# Altium PCB MotorDriverPCB.PcbDoc
Units mil, origin at the board's own origin, x right, y up, seen from the top; angles counter-clockwise.
Board outline 6000 x 4000 mil, 2 copper layers (Top Layer, Bottom Layer); 70 components, 46 nets, 245 pads, 1 vias.
Unrouted connection lines stored in the file: 128.
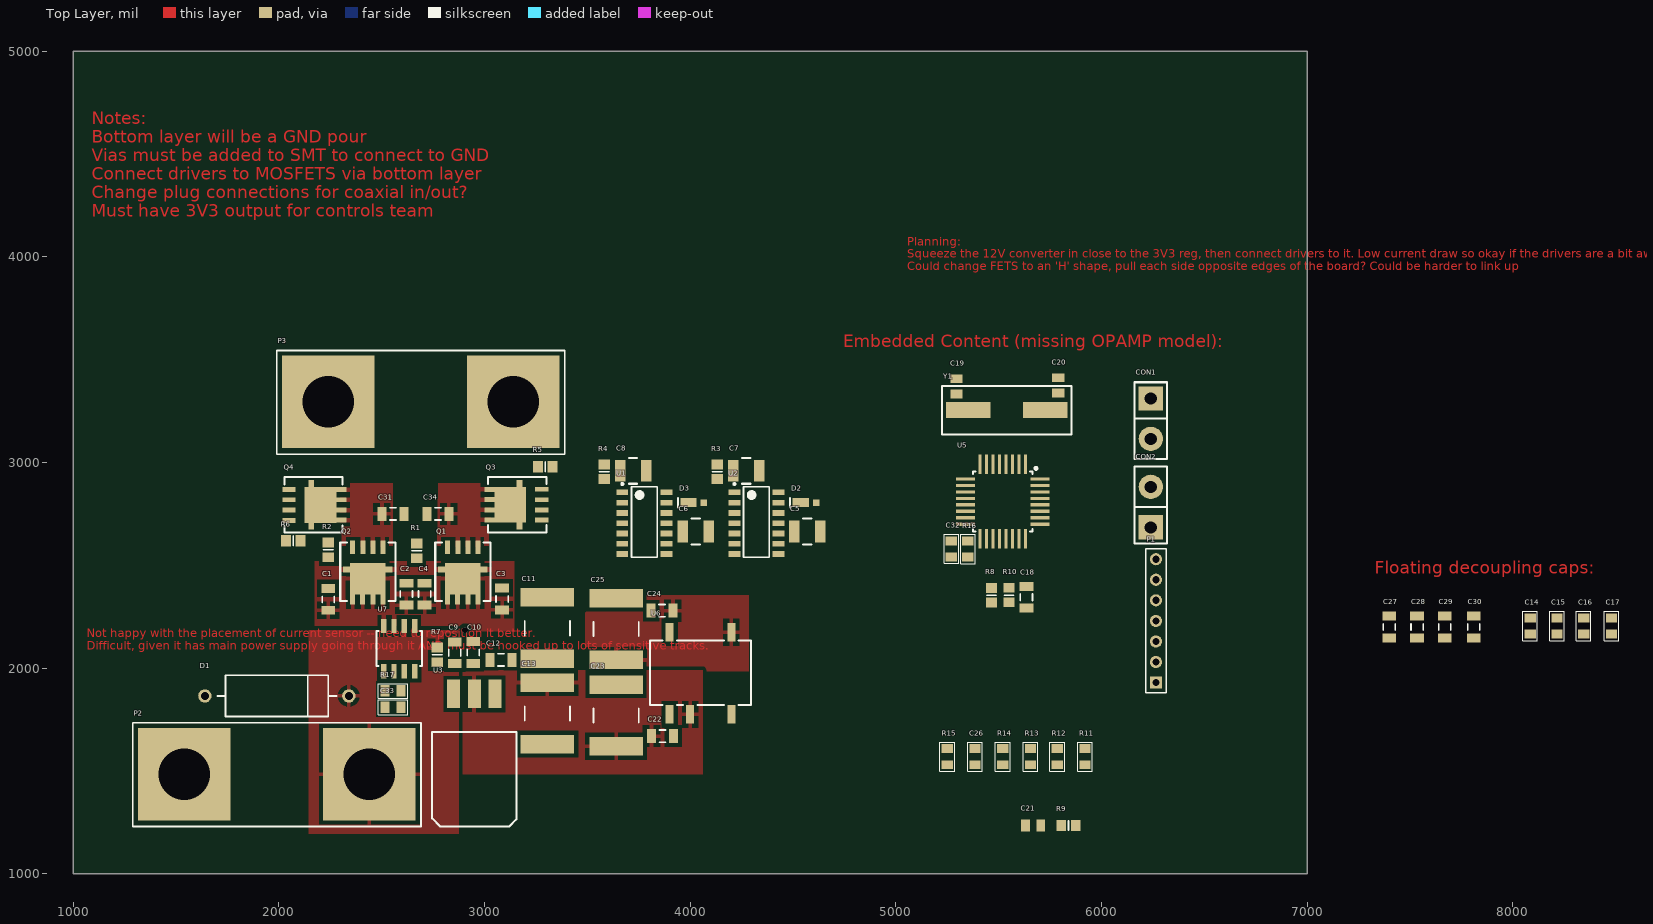
[diagram p0: Top Layer view]
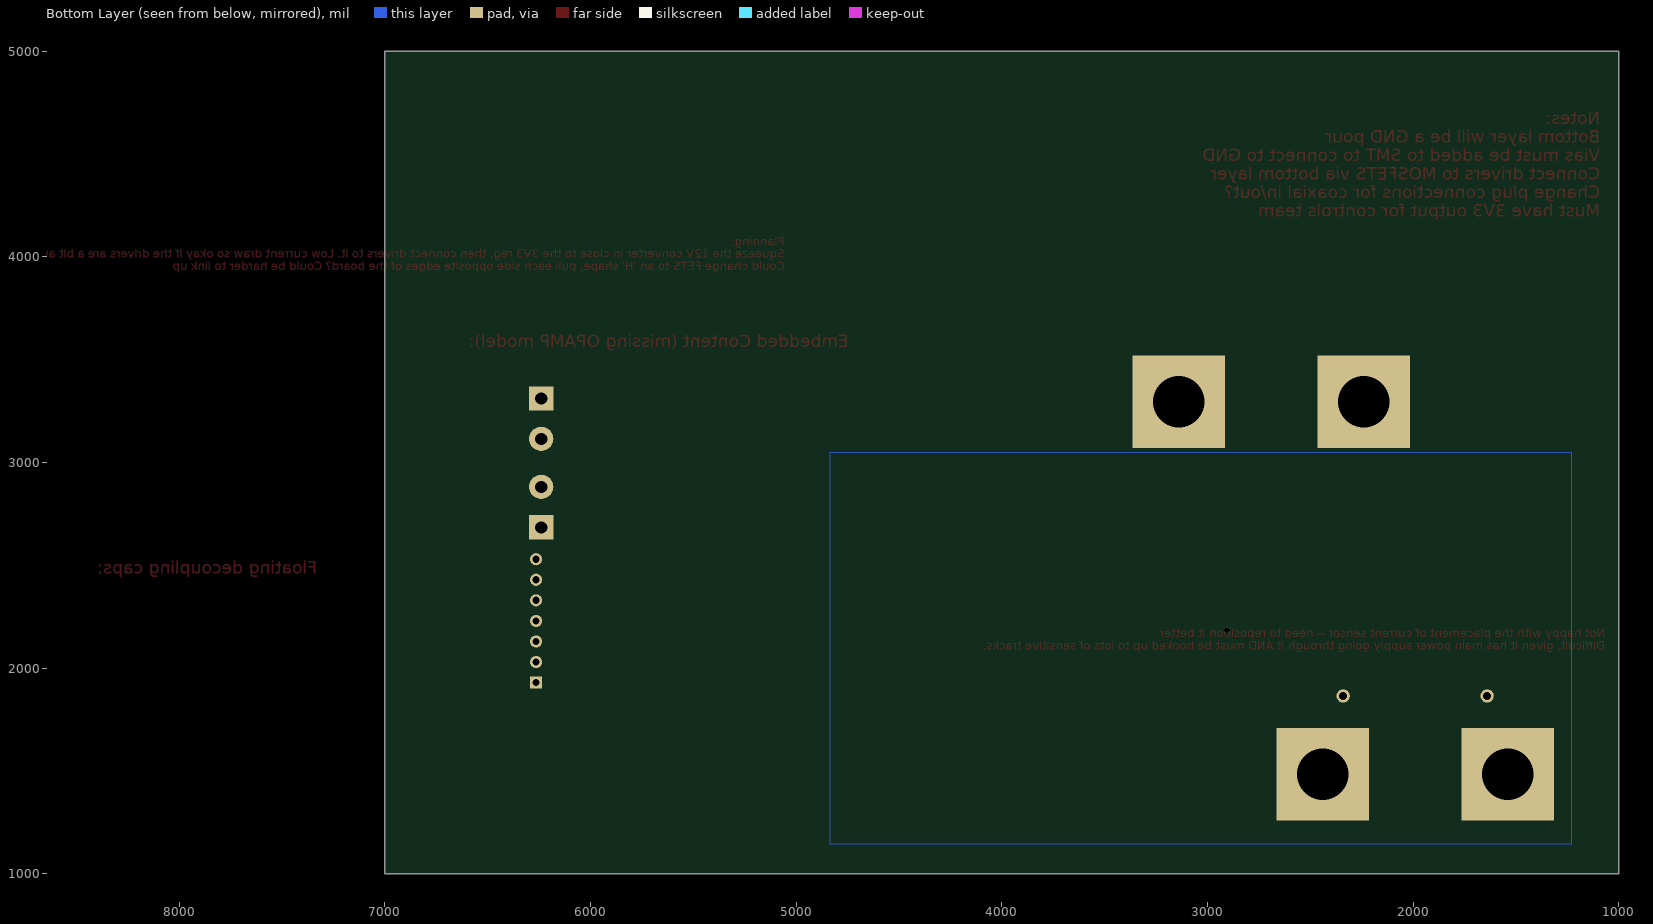
[diagram p1: Bottom Layer view, seen from below]

## Layer stack, top to bottom
Top Solder: solder mask 0.4, Solder Resist, Dk 3.5
Top Layer: signal copper 1.4
Dielectric 1: dielectric 12.6, FR-4, Dk 4.8
Bottom Layer: signal copper 1.4
Bottom Solder: solder mask 0.4, Solder Resist, Dk 3.5

## Board outline
1000,1000 7000,1000 7000,5000 1000,5000

## Design rules (kind name [scope] priority, off if disabled: settings)
BoardOutlineClearance [All] p1: gap=10 ignorepadtopadclearanceinfootprint=FALSE except(0: Arc-SplitContinuation Track-SplitContinuation SMDPad-SplitContinuation THPad-SplitContinuation Via-SplitContinuation Fill-SplitContinuation Poly-SplitContinuation Region-SplitContinuation Text-SplitContinuation)
Clearance [All] p1: gap=19.68 ignorepadtopadclearanceinfootprint=FALSE
Height [All] p1: minheight=0 maxheight=3937.01 prefheight=500
HoleSize [All] p1: absolutevalues=TRUE maxlimit=393.7 minlimit=19.68 maxpercent=80.000 minpercent=20.000
PolygonConnect [All] p1: connectstyle=Relief reliefconductorwidth=19.68 reliefentries=4 polygonreliefangle="90 Angle" airgapwidth=19.68
RoomDefinition ConverterSch [InComponentClass('ConverterSch')] p1: confinementstyle=ConfineIn formatcopy=TRUE lockcomponents=FALSE outline 845,900 8960,900 8960,9485 845,9485
RoutingVias [All] p1: holewidth=28 width=50 viastyle="Through Hole" minholewidth=28 minwidth=50 maxholewidth=28 maxwidth=50
SilkToSilkClearance [All] p1: silktosilkclearance=3.94
SilkToSolderMaskClearance [IsPad] p1: minsilkscreentomaskgap=3.94 clearancetoexposedcopper=TRUE
SolderMaskExpansion [All] p1: expansion=4 istentingtop=FALSE
Width [All] p1: maxlimit=393.7 minlimit=19.68 preferedwidth=39.37
26 further rules are at their usual default settings.

## Components (designator, comment, footprint, x,y, rotation, side; value= is the part's Value field where it differs from the comment)
C1 "Cap CER" C1206 2240,2335 r270 top value=100nF/100V
C2 "Cap CER" C1206 2620,2360 r270 top value=100nF/100V
C3 "Cap CER" C1206 3085,2336.85 r270 top value=100nF/100V
C4 "Cap CER" C1206 2708.31,2359.84 r270 top value=100nF/100V
C5 "Cap CER" C1210 4569.29,2665 r0 top value=2200nF/100V
C6 "Cap CER" C1210 4027.28,2665 r0 top value=2200nF/100V
C7 "Cap CER" C1210 4272.28,2960 r180 top value=2200nF/100V
C8 "Cap CER" C1210 3722.28,2960 r180 top value=2200nF/100V
C9 "CER 6.8nF" C1206 2855,2075 r270 top value=100nF/100V
C10 "CER 100nF" C1206 2945,2076.85 r270 top value=100nF/100V
C11 "Film 10uF" LDECE4150KA0N00 3305,2194.61 r270 top value=1.5uF/50V
C12 "CER 100nF" C1206 3080,2040 r180 top value=100nF/100V
C13 "Film 10uF" LDECE4150KA0N00 3305,1780.39 r90 top value=1.5uF/50V
C14 "" "0805 CAP" 8085,2205 r90 top
C15 "" "0805 CAP" 8215,2205 r90 top
C16 "" "0805 CAP" 8345,2205 r90 top
C17 "" "0805 CAP" 8480,2205 r90 top
C18 "CER 100nF" C1206 5635,2345 r90 top value=100nF/100V
C19 "Capacitor 0805" C0805 5295,3370 r90 top
C20 "Capacitor 0805" C0805 5790,3375 r90 top
C21 "Capacitor 0805" C0805 5667.4,1235 r0 top
C22 "CER 100nF" C1206 3865,1670 r180 top value=100nF/100V
C23 "Film 10uF" LDECE4150KA0N00 3640,1769.61 r270 top value=1.5uF/50V
C24 "CER 100nF" C1206 3863.15,2280 r0 top value=100nF/100V
C25 "Film 2.2uF" LDECE4150KA0N00 3640,2190 r270 top value=1.5uF/50V
C26 "" "0805 CAP" 5385,1570 r90 top
C27 "CER 100nF" C1206 7400,2200 r90 top value=100nF/100V
C28 "CER 100nF" C1206 7535,2200 r90 top value=100nF/100V
C29 "CER 100nF" C1206 7670,2200 r90 top value=100nF/100V
C30 "CER 100nF" C1206 7810,2200 r90 top value=100nF/100V
C31 "CER 100nF" C1206 2554.35,2750 r180 top value=100nF/100V
C32 "" "0805 CAP" 5270,2580 r270 top
C33 "" "0805 CAP" 2555,1810 r0 top
C34 "CER 100nF" C1206 2773.15,2750 r0 top value=100nF/100V
CON1 "Header 2X1" HDR2X1_5 6240,3211.85 r270 top
CON2 "Header 2X1" HDR2X1_5 6240,2785 r90 top
D1 "D Zener" DIODE-0.7 1990,1865 r0 top
D2 "MSS1P6-M3/89A" "MicroSMP (DO-219AD)" 4574.68,2805 r0 top
D3 "MSS1P6-M3/89A" "MicroSMP (DO-219AD)" 4029.68,2805 r0 top
P1 "BLE Headers" HDR1X7 6265,1930 r90 top
P2 "Dual Banana Plugs" "Dual Banana Plug" 1990,1485 r0 top
P3 "Dual Banana Plugs" "Dual Banana Plug" 2690,3295 r0 top
Q1 "NMOS" BSC072N08NS5ATMA1_modified_v2 2894,2465 r180 top
Q2 "NMOS" BSC072N08NS5ATMA1_modified_v2 2432,2465 r180 top
Q3 "NMOS" BSC072N08NS5ATMA1_modified_v2 3155.26,2795.14 r90 top
Q4 "NMOS" BSC072N08NS5ATMA1_modified_v2 2172,2794 r270 top
R1 "Resistor 0805" R0805 2670,2570.43 r90 top value=?
R2 "Resistor 0805" R0805 2240,2575.43 r90 top value=?
R3 "Resistor 0805" R0805 4132.28,2955 r90 top value=?
R4 "Resistor 0805" R0805 3582.28,2955 r90 top value=?
R5 "Resistor 0805" R0805 3295,2980 r0 top value=?
R6 "Resistor 0805" R0805 2069.57,2620 r180 top value=?
R7 "22k" R0805 2770,2065 r270 top value=?
R8 "Resistor 0805" R0805 5465,2355 r270 top value=?
R9 "Resistor 0805" R0805 5840,1235 r0 top
R10 "Resistor 0805" R0805 5550,2355.43 r90 top value=?
R11 "" "0805 RES" 5920,1570 r90 top
R12 "" "0805 RES" 5785,1570 r90 top
R13 "" "0805 RES" 5655,1570 r90 top
R14 "" "0805 RES" 5520,1570 r90 top
R15 "" "0805 RES" 5250,1570 r90 top
R16 "" "0805 RES" 5350,2579.37 r90 top
R17 "" "0805 RES" 2555,1890 r180 top
U1 "IRS21834SPBF" SOIC127P600X175-14N 3777.28,2705 r0 top
U2 "IRS21834SPBF" SOIC127P600X175-14N 4322.28,2705 r0 top
U3 "LD1086D2M33TR" D2PAK-3L 2950,1525 r180 top
U5 "ATMega328PB" TQFP32 5520,2810 r270 top
U6 "ISE0312A" ISE0312A 4050,1965 r90 top
U7 "ACS70331" ACS70331 2585,2095 r270 top
Y1 "SMT-XTAL 16MHz" HC49-US 5540,3255 r0 top

## Footprints (in the part's own frame and the unit in brackets; to place one, negate y for a bottom-side part, rotate by r counter-clockwise, add the part's x,y. Pads: shape width x height; smd on the part's side, far side on the other; paste and mask are expansions set on the pad)
"0805 CAP" [mm] "http://www.digikey.co.nz/Web%20Export/Supplier%20Content/Vishay_8026/PDF/VishayBeyschlag_SolderPad.pdf?redirected=1 with dimension G modified by +0.25mm"
  rect 1.1x1.4 smd: 1(-1,0) 2(1,0)
  silkscreen extent -1.8,-0.9 1.8,0.9, body extent -1.04,-0.66 1.04,0.66, height 0.61
"0805 RES" [mm] "http://www.digikey.co.nz/Web%20Export/Supplier%20Content/Vishay_8026/PDF/VishayBeyschlag_SolderPad.pdf?redirected=1 with dimension G modified by +0.25mm"
  rect 1.1x1.4 smd: 1(-1,0) 2(1,0)
  silkscreen extent -1.8,-0.9 1.8,0.9, body extent -1.04,-0.66 1.04,0.66, height 0.61
ACS70331 [mil] "8-SOIC model; 8 leads"
  rect 68.9x25.6 smd: 1(-110.24,75) 2(-110.24,25) 3(-110.24,-25) 4(-110.24,-75) 5(110.24,-75) 6(110.24,-25) 7(110.24,25) 8(110.24,75)
  silkscreen extent -85,-110 85,110, body extent -118,-97 118,96, height 62
BSC072N08NS5ATMA1_modified_v2 [mil]
  rect 23.94x65 smd: 1(-74,-123) 1(-25,-123) 1(24,-123) 4(75,-123) 8(-74,123) 8(-25,123) 8(25,123) 8(74,123)
  rect 65x27.87 smd: 8(-88,-15) 8(88,-15)
  rect 173.62x153.54 smd: 8(0,30.26)
  silkscreen extent -135,-146 134,138, body extent -106,-127 107,127, height 40
C0805 [mm]
  rect 1.1x1.5 smd: 1(-0.95,0) 2(0.95,0)
  body extent -1.1,-0.72 1.1,0.72, height 1.1
C1206 [mm] "Chip Capacitor, Body 3.2x1.6mm, IPC High Density"
  rect 1.1x1.7 smd: 1(-1.35,0) 2(1.35,0)
  silkscreen extent -0.4,-0.75 0.4,0.75, body extent -1.6,-0.8 1.6,0.8, height 1.5
C1210 [mm]
  rect 1.3x2.7 smd: 1(-1.6,0) 2(1.6,0)
  silkscreen extent -0.5,-1.6 0.5,1.6, body extent -1.8,-1.4 1.8,1.4, height 1.24
D2PAK-3L [mil]
  rect 63x137.8 smd: 1(100,-350) 2(0,-350) 3(-100,-350)
  silkscreen extent -205,-165 205,295, body extent -190,-400 190,279, height 200
DIODE-0.7 [mm] "Diode, Thru-Hole; 2 Leads; 0.7 in Pin Spacing"
  round 1.65 hole 1: 1(-8.89,0) 2(8.89,0)
  silkscreen extent -7.37,-2.54 7.37,2.54
"Dual Banana Plug" [mil] "Connector; 2 Position"
  rect 450x450 hole 250: 1(-450,0) 2(450,0)
  silkscreen extent -701,-255 701,250, body extent -684,-236 686,236, height 217
HC49-US [mm] "20Mhz Crystal"
  rect 5.5x2 smd: 1(-4.75,0) 2(4.75,0)
  silkscreen extent -8,-3 8,3, body extent -4.77,-2.4 4.79,2.4, height 3.8
HDR1X7 [mm] "Connector; Header; 7 Position"
  rect 1.5x1.5 hole 0.9: 1(0,0)
  round 1.5 hole 0.9: 2(2.54,0) 3(5.08,0) 4(7.62,0) 5(10.16,0) 6(12.7,0) 7(15.24,0)
  silkscreen extent -1.27,-1.27 16.51,1.27
HDR2X1_5 [mm]
  rect 3x3 hole 1.5: 1(-2.54,0)
  round 3 hole 1.5: 2(2.46,0)
  silkscreen extent -4.54,-2 4.96,2
ISE0312A [mil] "8-SMD model; 5 leads"
  rect 90x39 smd: 1(-190,150) 2(-190,50) 4(-190,-150) 5(210,-150) 8(210,150)
  silkscreen extent -145,-245 170,245, body extent -210,-250 230,250, height 285
LDECE4150KA0N00 [mm]
  rect 2.3x6.6 smd: 1(-3.8,0) 2(3.8,0)
  silkscreen extent -0.9,-2.8 0.9,2.8, body extent -3.82,-3.26 3.88,3.24, height 4.29
"MicroSMP (DO-219AD)" [mm]
  rect 0.8x0.8 smd: 1(0.95,0)
  rect 2x1.1 smd: 2(-0.95,0)
  silkscreen extent -2.25,-0.6 -2.25,0.6, body extent -1.58,-0.64 0.92,0.66, height 0.66
R0805 [mm]
  rect 1.2x1.4 smd: 1(-0.9,0) 2(0.9,0)
  silkscreen extent 0,-0.6 0,0.6, body extent -1.04,-0.63 0.99,0.64, height 0.6
SOIC127P600X175-14N [mm] "SOIC, 14-Leads, Body 8.65x3.90mm, Pitch 1.27mm, IPC Medium Density"
  rect 1.45x0.7 smd: 1(-2.725,3.81) 2(-2.725,2.54) 3(-2.725,1.27) 4(-2.725,0) 5(-2.725,-1.27) 6(-2.725,-2.54) 7(-2.725,-3.81) 8(2.725,-3.81) 9(2.725,-2.54) 10(2.725,-1.27) 11(2.725,0) 12(2.725,1.27) 13(2.725,2.54) 14(2.725,3.81)
  silkscreen extent -2.85,-4.22 1.6,4.97, body extent -3,-4.19 3,4.46, height 1.56
TQFP32 [mm]
  rect 2.4x0.4 smd: 1(-4.6,2.8) 2(-4.6,2) 3(-4.6,1.2) 4(-4.6,0.4) 5(-4.6,-0.4) 6(-4.6,-1.2) 7(-4.6,-2) 8(-4.6,-2.8) 17(4.6,-2.8) 18(4.6,-2) 19(4.6,-1.2) 20(4.6,-0.4) 21(4.6,0.4) 22(4.6,1.2) 23(4.6,2) 24(4.6,2.8)
  rect 0.4x2.4 smd: 9(-2.8,-4.6) 10(-2,-4.6) 11(-1.2,-4.6) 12(-0.4,-4.6) 13(0.4,-4.6) 14(1.2,-4.6) 15(2,-4.6) 16(2.8,-4.6) 25(2.8,4.6) 26(2,4.6) 27(1.2,4.6) 28(0.4,4.6) 29(-0.4,4.6) 30(-1.2,4.6) 31(-2,4.6) 32(-2.8,4.6)
  silkscreen extent -4.24,-3.7 3.7,4.24, body extent -3.5,-3.5 3.5,3.5, height 1.3

## Part data
C1 C2 C3 C4 C9 C10 C12 C18 C22 C24 C27 C28 C29 C30 C31 C34: library part "Cap CER Decoup C3216C0G2A104J160AC", "CAP CER 0.1UF 100V C0G 1206", Manufacturer="TDK Corporation", MPN=C3216C0G2A104J160AC, Supplier Part Number 1=1795799, Part Description="CAP CER 0.1UF 100V C0G 1206", Supplier 1=RSComponents, Supplier 2=Element14, Supplier 3=Digi-Key, Supplier 4=Mouser, Supplier Part Number 2=2906828, Supplier Part Number 3=445-172677-1-ND, Supplier Part Number 4=810-C3216C0G2A104J6C, Type="Surface mount"
C5 C6 C7 C8: library part "Cap CER HF DC-Link CL32B225KCJSNNE", "CAP CER 2.2UF 100V X7R 1210", Manufacturer="AVX Corporation", MPN=CL32B225KCJSNNE, Supplier Part Number 1=1276-3362-1-ND, Part Description="CAP CER 2.2UF 100V X7R 1210", Supplier 1=Digi-Key, Supplier 2=Arrow, Type="Surface mount"
  C5 C6: Supplier Part Number 2=CL32B225KCJSNNE
C11 C13 C23 C25: library part "Cap Film SMD LDECE4150KA0N00", "CAP FILM 1.5UF 10% 50VDC 2824", Manufacturer=KEMET, MPN=LDECE4150KA0N00, Supplier Part Number 1=2495712, Part Description="CAP FILM 1.5UF 10% 50VDC 2824", Supplier 1=Element14, Supplier 2=RSComponents, Supplier 3=Digi-Key, Supplier 4=Mouser, Supplier Part Number 2=1650342, Supplier Part Number 3=399-12858-1-ND, Supplier Part Number 4=80-LDECE4150KA0N00, Type="Surface mount"
C14 C15 C16 C17 C26 C32 C33: library part CerCap_SMT_0805, "SMT ceramic capacitor 0805 size"
C19 C20 C21: library part CCAP0805, "CCAP0805"
CON1 CON2: library part HDR2X1
D1: "Zener Diode", LatestRevisionDate=17-Jul-2002, LatestRevisionNote="Re-released for DXP Platform.", PackageDescription="Diode, Thru-Hole; 2 Leads; 0.7 in Pin Spacing", PackageReference=DIODE-0.7, Published=8-Jun-2000, Publisher="Altium Limited"
D2 D3: library part "Diode MSS1P6-M3/89A", "DIODE SCHOTTKY 60V 1A MICROSMP", Manufacturer="Vishay Semiconductor Diodes Division", Supplier Part Number 1=7103070P, MPN=MSS1P6-M3/89A, Part Description="DIODE SCHOTTKY 60V 1A MICROSMP", Supplier 1=RSComponents, Supplier 2=Element14, Supplier Part Number 2=2335157, Type="Surface mount"
P1: library part "Header 7", "Header, 7-Pin", LatestRevisionDate=17-Jul-2002, LatestRevisionNote="Re-released for DXP Platform.", Publisher="Altium Limited"
P2 P3: library part AC_Output, "Dual banana plugs connection to the AC load", LatestRevisionDate=17-Jul-2002, LatestRevisionNote="Re-released for DXP Platform.", Publisher="Altium Limited"
Q1 Q2 Q3 Q4: library part "NMOS OptiMOS BSC072N08NS5ATMA1", "MOSFET N-CH 80V 74A 8TDSON", Manufacturer="Infineon Technologies", MPN=BSC072N08NS5ATMA1, Supplier Part Number 1=2725812, Part Description="MOSFET N-CH 80V 74A 8TDSON", Supplier 1=Element14, Supplier 2=Digi-Key, Supplier 3=Mouser, Supplier Part Number 2=BSC072N08NS5ATMA1CT-ND, Supplier Part Number 3=726-BSC072N08NS5ATMA, Type="Surface mount"
R1 R2 R3 R4 R5 R6 R7 R8 R10: library part RES0805, "RES0805", MPN=?, Part Description=?, Type="Surface Mount"
R9: library part RES0805, "RES0805"
R11 R12 R13 R14 R15 R16 R17: library part Res_SMT_0805, "0805 resistor", ComponentLink1Description=https://nz.mouser.com/datasheet/2/315/AOA0000C304-1149620.pdf, LatestRevisionDate=17-Jul-2002, LatestRevisionNote="Re-released for DXP Platform.", PackageReference=AXIAL-0.4, Published=8-Jun-2000, Publisher="Altium Limited"
U1 U2: "IC GATE DRVR HALF-BRIDGE 14SOIC"
U3: "3.3V linear voltage regulator"
U5: "IC MCU 8BIT 32KB FLASH 32TQFP", Supplier Part Number 1=ATMEGA328PB-AU-ND, Supplier 1=Digi-Key, Supplier 2=Digikey, Supplier Part Number 2=ATMEGA328PB-AU-ND
U6: library part ISE0312A_8-SMD_5L, "3V-12V DC DC converter"
U7: library part ACS70331_SOIC_8L, "1MHz high sensitivity current sensor"
Y1: library part TXC9C-16_XTAL_SMT, "9C-16.000MAAJ-T crystal 16.0000MHZ 18PF SMD", Frequency Stability=±30ppm, Load Capacitance=18pF, Manufacturer="TXC CORPORATION", Manufacturer Part Number=9C-16.000MAAJ-T, Operating Mode=Fundamental, Operating Temperature="-20°C ~ 70°C", Package / Case=HC-49/US, Ratings=-, Supplier Part Number 1=887-1059-1-ND, Category="Crystals, Oscillators, Resonators", ComponentLink1Description=http://www.txccorp.com/download/products/quartz_crystals/2015TXC_9C_32.pdf, ComponentLink1URL=http://www.txccorp.com/download/products/quartz_crystals/2015TXC_9C_32.pdf, Frequency Tolerance=±30ppm, Height - Seated (Max)="0.161\" (4.10mm)", Mounting Type="Surface Mount", Packaging="Cut Tape (CT)", Part Status=Active, Pricing 1="1=0.75, 10=0.628, 50=0.5656, 100=0.5026, 500=0.47744 (NZD)", RoHS="RoHS Compliant", Size / Dimension="0.449\" L x 0.189\" W (11.40mm x 4.80mm)", Stock 1=11514, Supplier 1=Digi-Key, Type="MHz Crystal"

## Via types
v1: diameter 28, hole 28, Top Layer to Bottom Layer, 1 vias

## Nets (pads, with @x,y where several pads share a name; then routed paths per layer and width w, separated by ;. In a path a pad name is that pad's centre, name@x,y a point inside that pad or via, vN(x,y) a via of type N, cw(c..) or ccw(c..) an arc to the next point about the centre after c; other vN are vias at no path point)
3V3: C12.2 C13.2 C14.1 C17.1 C22.2 C23.2 C27.2 C28.2 C32.1 P1.1 R9.2 R16.2 U3.2 U5.4 U5.20 U6.2 U7.8
12V: C24.2 C25.2 C29.2 C30.2 D2.1 D3.1 U1.7 U2.7 U6.5
CGND: C24.1 C25.1 U6.4
CTS: P1.4
DGND: U1.4 U1.5 U2.4 U2.5
Direction_Signal: CON1.1 U5.1
EXTRA: CON1.2 U5.28
GND: C1.1 C2.1 C3.1 C4.1 C7.1 C8.1 C9.1 C10.1 C11.1 C12.1 C13.1 C14.2 C15.2 C16.2 C17.2 C18.1 C19.2 C20.2 C21.2 C22.1 C23.1 C26.2 C27.1 C28.1 C29.1 C30.1 C31.1 C32.2 C33.2 C34.1 D1.1 P1.2 P2.1 Q3.1 Q4.1 R10.1 R14.1 R15.1 U1.3 U2.3 U3.3 U5.5 U5.21 U6.1 U7.5
  other v1: 2905,2185
NC: U7.6
NetC7_2: C7.2 R3.1 U2.1 U2.2
NetC8_2: C8.2 R4.1 U1.1 U1.2
NetQ1_4: Q1.4 R1.2
NetQ2_4: Q2.4 R2.2
NetQ3_4: Q3.4 R5.2
NetQ4_4: Q4.4 R6.2
NetR1_1: R1.1 U1.12
NetR2_1: R2.1 U2.12
NetR3_2: R3.2 U5.9
NetR4_2: R4.2 U5.10
NetR5_1: R5.1 U1.6
NetR6_1: R6.1 U2.6
NetR11_1: R11.1 R12.2
NetR11_2: R11.2 R13.1
NetR14_2: R14.2 R15.2
NetR16_1: R16.1 U5.18
NetR17_1: R17.1 U7.7
NetU4_1: 
RST: C21.1 R9.1 U5.29
RST_BT: P1.7 U5.11
RTS: P1.3
RX_BT: P1.6 U5.30
S1H: C6.1 C34.2 P3.2 Q1.1 Q3.8 U1.11
S2H: C5.1 C31.2 P3.1 Q2.1 Q4.8 U2.11
Spd_Sig0: CON2.1 U5.26
Spd_Sig1: CON2.2 U5.27
TX_BT: P1.5 U5.31
VB1: C6.2 D3.2 U1.13
VB2: C5.2 D2.2 U2.13
Vc_amplified: C26.1 R13.2 U5.23
Vin: C16.1 D1.2 P2.2 R7.1 R8.2 U7.1 U7.2
VinFILT: C9.2 C10.2 C11.2 R7.2 U3.1
VinMEASn: C1.2 C2.2 C3.2 C4.2 Q1.8 Q2.8 U7.3 U7.4
Viout: C15.1 C33.1 R12.1 R17.2
Vs: C18.2 R8.1 R10.2 U5.24
X1: C19.1 U5.7 Y1.1
X2: C20.1 U5.8 Y1.2
pads on no net: U1.8 U1.9 U1.10 U1.14 U2.8 U2.9 U2.10 U2.14 U5.2 U5.3 U5.6 U5.12 U5.13 U5.14 U5.15 U5.16 U5.17 U5.19 U5.22 U5.25 U5.32 U6.8

## Polygon pours and split planes (outlines as drawn)
3V3 on Top Layer "3V3_L01_P012" (solid, remove dead copper, pour order 12): 3385,1990 2895,1990 2895,1485 4060,1485 4060,1990
12V on Top Layer "12V_L01_P013" (solid, remove dead copper, pour order 13): 4285,2355 3490,2355 3490,1985 4285,1985
Vin on Top Layer "VIN_L01_P000" (solid, remove dead copper, pour order 0): 2145,2185.16 2145,1195 2875,1195 2875,2185.16
VinMEASn on Top Layer "VINMEASN_L01_P014" (solid, remove dead copper, pour order 14): 2175,2520 2175,2180 3145,2180 3145,2520
S2H on Top Layer "S2H_L01_P010" (solid, remove dead copper, pour order 10): 2310,2900 2304.35,2595 2554.35,2595 2554.35,2900
S1H on Top Layer "S1H_L01_P007" (solid, remove dead copper, pour order 7): 2775.65,2900 2770,2595 3020,2595 3020,2900
GND on Bottom Layer "NONET_L02_P016" (solid, remove dead copper, shelved, pour order 16): 1230,3050 1230,1145 4835,1145 4835,3050

## Other copper
Top Layer:
  text "Notes: / Bottom layer will be a GND pour / Vias must be added to SMT to connect to GND / Connect drivers to MOSFETS via bottom layer / Change plug connections for coaxial in/out? / Must have 3V3 output for controls team" at 1090,4195 h60
  text "Planning: / Squeeze the 12V converter in close to the 3V3 reg, then connect drivers to it. Low current draw so okay if the drivers are a bit away from it for convenience. Try keep distances between MCU->driver and driver->FET low to prevent noise on the control signals. / Could change FETS to an 'H' shape, pull each side opposite edges of the board? Could be harder to link up" at 5055,3935 h40
  text "Embedded Content (missing OPAMP model):" at 4745,3559.99 h60
  text "Floating decoupling caps:" at 7330,2459.99 h60
  text "Not happy with the placement of current sensor -- need to reposition it better. / Difficult, given it has main power supply going through it AND must be hooked up to lots of sensitive tracks." at 1065,2090 h40